# Altium PCB ALU_Logic.PcbDoc
Units mil, origin at the board's own origin, x right, y up, seen from the top; angles counter-clockwise.
Board outline 5200 x 2700 mil, 2 copper layers (Top Layer, Bottom Layer), stack 61.756 mil thick; 36 components, 79 nets, 306 pads, 155 vias.
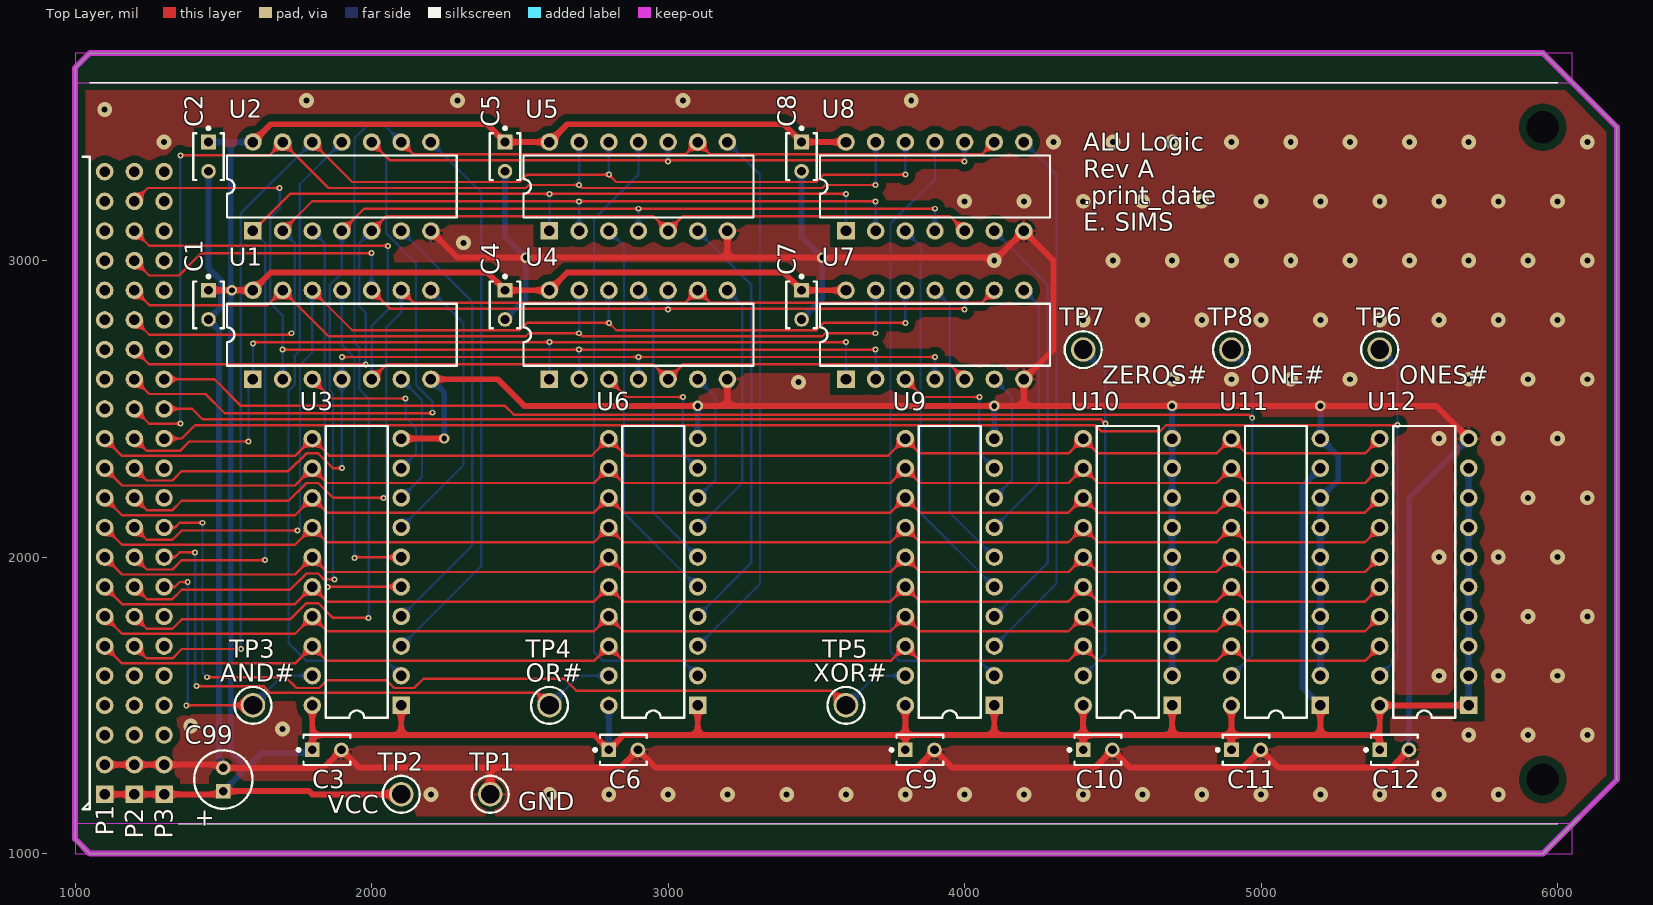
[diagram p0: Top Layer view]
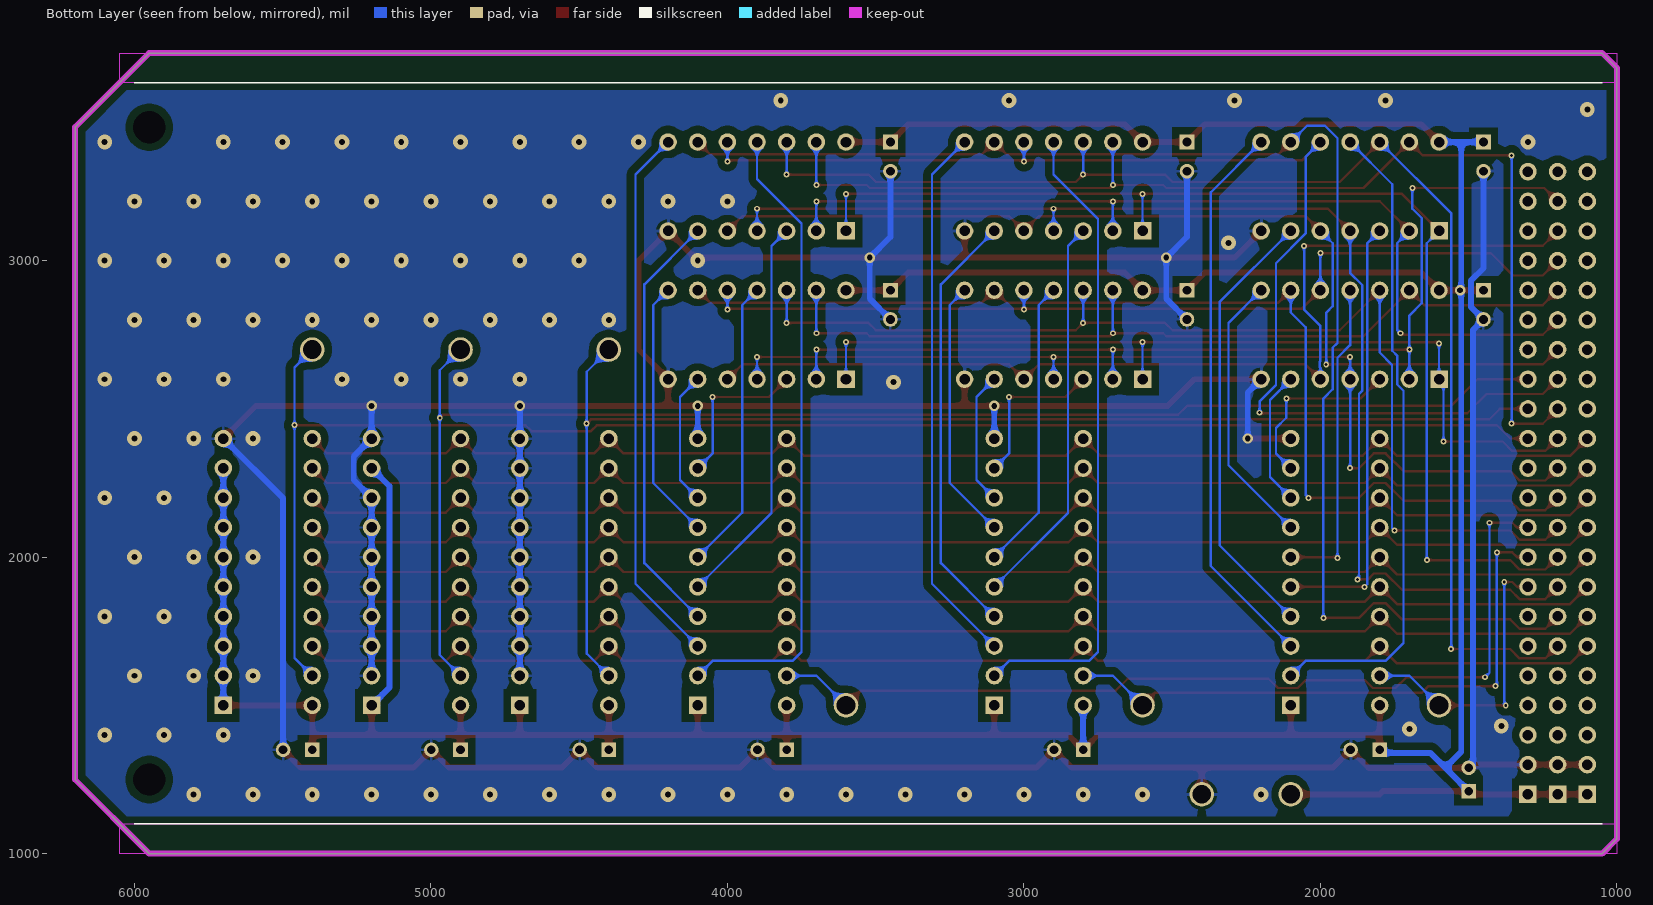
[diagram p1: Bottom Layer view, seen from below]

## Layer stack, top to bottom
Top Solder: solder mask 1, SM-001, Dk 4
Top Layer: signal copper 1.378
Dielectric 1: core 59, Core-043, Dk 4.3
Bottom Layer: signal copper 1.378
Bottom Solder: solder mask 1, SM-001, Dk 4

## Board outline
1000,1050 1050,1000 5950,1000 6200,1250 6200,3450 5950,3700 1050,3700 1000,3650

## Design rules (kind name [scope] priority, off if disabled: settings)
Clearance Clearance_Poly [InPoly] p1: gap=25 ignorepadtopadclearanceinfootprint=FALSE
Clearance [All] p2: gap=8 ignorepadtopadclearanceinfootprint=FALSE
HoleSize [All] p1: absolutevalues=TRUE maxlimit=120 minlimit=1 maxpercent=80.000 minpercent=20.000
PolygonConnect [All] p1: thpad.connectstyle=Relief thpad.reliefconductorwidth=10 thpad.reliefentries=4 thpad.polygonreliefangle="90 Angle" thpad.airgapwidth=10 smdpad.connectstyle=Relief smdpad.reliefconductorwidth=10 smdpad.reliefentries=4 smdpad.polygonreliefangle="90 Angle" smdpad.airgapwidth=10 via.connectstyle=Direct via.reliefconductorwidth=10 via.reliefentries=4 via.polygonreliefangle="90 Angle" via.airgapwidth=10
RoutingVias "Schematic Routing Via Style" [InNetClass('PWR')] p1: holewidth=20 width=35 viastyle="Through Hole" minholewidth=20 minwidth=35 maxholewidth=20 maxwidth=50
RoutingVias [All] p2: holewidth=10 width=20 viastyle="Through Hole" minholewidth=10 minwidth=20 maxholewidth=10 maxwidth=20
SilkToSilkClearance [All] p1: silktosilkclearance=5
SolderMaskExpansion [All] p1: expansion=4 istentingtop=FALSE
Width "Schematic Width Constraint" [InNetClass('PWR')] p1: maxlimit=50 minlimit=20 preferedwidth=20
Width [All] p2: maxlimit=8 minlimit=8 preferedwidth=8
28 further rules are at their usual default settings.

## Classes and differential pairs
net class REG[0..7]: REG0 REG1 REG2 REG3 REG4 REG5 REG6 REG7
net class PWR: GND VCC
net class AND[0..7]: AND0 AND1 AND2 AND3 AND4 AND5 AND6 AND7
net class XOR[0..7]: XOR0 XOR1 XOR2 XOR3 XOR4 XOR5 XOR6 XOR7
component class ZEROS: C10 U10
component class ONE: C11 U11
component class ONES: C12 U12
component class XOR: C7 C8 C9 U7 U8 U9
net class Y[0..7]: Y0 Y1 Y2 Y3 Y4 Y5 Y6 Y7
net class X[0..7]: X0 X1 X2 X3 X4 X5 X6 X7
component class OR: C4 C5 C6 U4 U5 U6
component class AND: C1 C2 C3 U1 U2 U3
component class ALU_Logic: C99 P1 P2 P3 TP1 TP2 TP3 TP4 TP5 TP6 TP7 TP8
net class BUS[0..7]: BUS0 BUS1 BUS2 BUS3 BUS4 BUS5 BUS6 BUS7

## Components (designator, comment, footprint, x,y, rotation, side; value= is the part's Value field where it differs from the comment)
C1 "K104K15X7RF5TL2" VISH-K104K15X7RF5TL2 1450,2850.79 r270 top locked
C2 "K104K15X7RF5TL2" VISH-K104K15X7RF5TL2 1450,3350.79 r270 top locked
C3 "K104K15X7RF5TL2" VISH-K104K15X7RF5TL2 1849.21,1350 r0 top locked
C4 "K104K15X7RF5TL2" VISH-K104K15X7RF5TL2 2450,2850.79 r270 top locked
C5 "K104K15X7RF5TL2" VISH-K104K15X7RF5TL2 2450,3350.79 r270 top locked
C6 "K104K15X7RF5TL2" VISH-K104K15X7RF5TL2 2849.21,1350 r0 top locked
C7 "K104K15X7RF5TL2" VISH-K104K15X7RF5TL2 3450,2850.79 r270 top locked
C8 "K104K15X7RF5TL2" VISH-K104K15X7RF5TL2 3450,3350.79 r270 top locked
C9 "K104K15X7RF5TL2" VISH-K104K15X7RF5TL2 3849.21,1350 r0 top locked
C10 "K104K15X7RF5TL2" VISH-K104K15X7RF5TL2 4449.21,1350 r0 top locked
C11 "K104K15X7RF5TL2" VISH-K104K15X7RF5TL2 4949.21,1350 r0 top locked
C12 "K104K15X7RF5TL2" VISH-K104K15X7RF5TL2 5449.21,1350 r0 top locked
C99 "Cap Pol5" C5x7 1500,1250 r90 top locked value=10uF
P1 "Header 22H" HDR1X22H 1100,1200 r90 top locked
P2 "Header 22H" HDR1X22H 1200,1200 r90 top locked
P3 "Header 22H" HDR1X22H 1300,1200 r90 top locked
TP1 "GND" KSTN-5011_V 2400,1200 r0 top locked
TP2 "VCC" KSTN-5011_V 2100,1200 r0 top locked
TP3 "AND#" KSTN-5011_V 1600,1500 r0 top locked
TP4 "OR#" KSTN-5011_V 2600,1500 r0 top locked
TP5 "XOR#" KSTN-5011_V 3600,1500 r0 top locked
TP6 "ONES#" KSTN-5011_V 5400,2700 r0 top locked
TP7 "ZEROS#" KSTN-5011_V 4400,2700 r0 top locked
TP8 "ONE#" KSTN-5011_V 4900,2700 r0 top locked
U1 "SN74LS08N" N014 1900,2750 r0 top locked
U2 "SN74LS08N" N014 1900,3250 r0 top locked
U3 "SN74LS245N" N020 1950,1950 r90 top locked
U4 "SN74LS32N" N014 2900,2750 r0 top locked
U5 "SN74LS32N" N014 2900,3250 r0 top locked
U6 "SN74LS245N" N020 2950,1950 r90 top locked
U7 "SN74LS86AN" N014 3900,2750 r0 top locked
U8 "SN74LS86AN" N014 3900,3250 r0 top locked
U9 "SN74LS245N" N020 3950,1950 r90 top locked
U10 "SN74LS245N" N020 4550,1950 r90 top locked
U11 "SN74LS245N" N020 5050,1950 r90 top locked
U12 "SN74LS245N" N020 5550,1950 r90 top locked

## Footprints (in the part's own frame and the unit in brackets; to place one, negate y for a bottom-side part, rotate by r counter-clockwise, add the part's x,y. Pads: shape width x height; smd on the part's side, far side on the other; paste and mask are expansions set on the pad)
C5x7 [mm] "Capacitor; 2 Leads"
  rect 1.25x1.25 hole 0.75: 1(-1,0)
  round 1.25 hole 0.75: 2(1,0)
  silkscreen extent -2.5,-2.5 2.5,2.5, body extent -2.5,-2.5 2.5,2.5, height 7
HDR1X22H [mm] "Connector; Header; 22 Position; Right Angle"
  rect 1.5x1.5 hole 0.9: 1(0,0)
  round 1.5 hole 0.9: 2(2.54,0) 3(5.08,0) 4(7.62,0) 5(10.16,0) 6(12.7,0) 7(15.24,0) 8(17.78,0) 9(20.32,0) 10(22.86,0) 11(25.4,0) 12(27.94,0) 13(30.48,0) 14(33.02,0) 15(35.56,0) 16(38.1,0) 17(40.64,0) 18(43.18,0) 19(45.72,0) 20(48.26,0) 21(50.8,0) 22(53.34,0)
  silkscreen extent -1.27,1.27 54.61,1.91
KSTN-5011_V [mm] "Test Point, Dia 3.17mm"
  round 2.1 hole 1.6: 1(0,0)
  silkscreen extent -1.59,-1.58 1.59,1.58, body extent -1.59,-1.59 1.59,1.59, height 8.13
N014 [mm] "DIP; 14 Leads; Row Spacing 7.62 mm; Pitch 2.54 mm"
  rect 1.5x1.5 hole 0.9: 1(-7.62,-3.81)
  round 1.5 hole 0.9: 2(-5.08,-3.81) 3(-2.54,-3.81) 4(0,-3.81) 5(2.54,-3.81) 6(5.08,-3.81) 7(7.62,-3.81) 8(7.62,3.81) 9(5.08,3.81) 10(2.54,3.81) 11(0,3.81) 12(-2.54,3.81) 13(-5.08,3.81) 14(-7.62,3.81)
  silkscreen extent -9.85,-2.65 9.85,2.65, body extent -9.15,-5.08 9.15,5.12, height 7.88
N020 [mm] "DIP; 20 Leads; Row Spacing 7.62 mm; Pitch 2.54 mm"
  rect 1.5x1.5 hole 0.9: 1(-11.43,-3.81)
  round 1.5 hole 0.9: 2(-8.89,-3.81) 3(-6.35,-3.81) 4(-3.81,-3.81) 5(-1.27,-3.81) 6(1.27,-3.81) 7(3.81,-3.81) 8(6.35,-3.81) 9(8.89,-3.81) 10(11.43,-3.81) 11(11.43,3.81) 12(8.89,3.81) 13(6.35,3.81) 14(3.81,3.81) 15(1.27,3.81) 16(-1.27,3.81) 17(-3.81,3.81) 18(-6.35,3.81) 19(-8.89,3.81) 20(-11.43,3.81)
  silkscreen extent -12.5,-2.65 12.5,2.65, body extent -13.08,-5.08 13.08,5.12, height 7.88
VISH-K104K15X7RF5TL2 [mm] "THD, 2-Leads, Body 4x2.6mm"
  rect 1.25x1.25 hole 0.75: 1(-1.25,0)
  round 1.25 hole 0.75: 2(1.25,0)
  silkscreen extent -2.55,-1.3 2,1.3, body extent -2,-1.3 2,1.3, height 5.6

## Part data
C1 C2 C3 C4 C5 C6 C7 C8 C9 C10 C11 C12: library part CMP-2000-06508-1, "Ceramic Capacitor, 100 nF, +/- 10%, 50 V, -55 to 125 degC, 2-Pin THD, RoHS, Tape and Reel", Capacitance=0.1µF, Manufacturer=Vishay, Operating Temperature=-55°C~125°C, Package / Case=Radial, Package Description="2-Pin Through Hole Device, Body 4 x 2.6 mm", Ratings=-, Standard Package=1, Temperature Coefficient=X7R, Tolerance=±10%, Voltage - Rated=50V, Applications=GeneralPurpose, Catalog Drawings=Mono-KapSide2-15_5.58Mono-KapSide1_15, Category=Capacitors, Datasheet URL=http://www.vishay.com/docs/45171/kseries.pdf, Datasheet Version=08/2013, Family=CeramicCapacitors, Features=-, Height - Seated (Max)="0.220\"(5.58mm)", Lead Spacing="0.098\"(2.50mm)", Lead Style=Straight, Manufacturer URL=http://www.vishay.com/, Mounting Technology=ThroughHole, Mounting Type=ThroughHole, Online Catalog=Mono-Kap™Series, Other Names=BC1084CT, Package Reference=K104K15X7RF5TL2, Packaging=CutTape(CT), Series=Mono-Kap™K, Size / Dimension="0.157\"Lx0.098\"W(4.00mmx2.50mm)", Thickness (Max)=-
C99: "Polarized Capacitor", LatestRevisionDate=17-Jul-2002, LatestRevisionNote="Re-released for DXP Platform.", PackageDescription="Polarized Capacitor; 2 Leads", PackageReference=POLAR0.8, Published=8-Jun-2000, Publisher="Altium Limited"
P1 P2 P3: "Header, 22-Pin, Right Angle", LatestRevisionDate=17-Jul-2002, LatestRevisionNote="Re-released for DXP Platform.", Publisher="Altium Limited", System=Connector
TP1 TP2 TP3 TP4 TP5 TP6 TP7 TP8: library part TP
U1 U2: "Quadruple 2-Input Positive-AND Gate", ComponentLink1Description="Manufacturer Link", ComponentLink1URL=http://www.ti.com/, ComponentLink2Description=Datasheet, ComponentLink2URL=http://www-s.ti.com/sc/ds/SN74LS08.pdf, DatasheetVersion=Mar-1988, LatestRevisionDate=04-Mar-2005, LatestRevisionNote="Stylized 3D Model Added.", PackageDescription="DIP; 14 Leads; Row Spacing 7.62 mm; Pitch 2.54 mm", PackageReference=N014, PackageVersion=Oct-1995, Published=8-Jun-2000, Publisher="Altium Limited"
U3 U6 U9 U10 U11 U12: "Octal Bus Transceiver with 3-State Outputs", ComponentLink1Description="Manufacturer Link", ComponentLink1URL=http://www.ti.com/, ComponentLink2Description=Datasheet, ComponentLink2URL=http://www-s.ti.com/sc/ds/sn74ls245.pdf, DatasheetVersion=Mar-1988, LatestRevisionDate=04-Mar-2005, LatestRevisionNote="Stylized 3D Model Added.", PackageDescription="DIP; 20 Leads; Row Spacing 7.62 mm; Pitch 2.54 mm", PackageReference=N020, PackageVersion=Oct-1995, Published=8-Jun-2000, Publisher="Altium Limited"
U4 U5: "Quadruple 2-Input Positive-OR Gate", ComponentLink1Description="Manufacturer Link", ComponentLink1URL=http://www.ti.com/, ComponentLink2Description=Datasheet, ComponentLink2URL=http://www-s.ti.com/sc/ds/sn74ls32.pdf, DatasheetVersion=Mar-1988, LatestRevisionDate=04-Mar-2005, LatestRevisionNote="Stylized 3D Model Added.", PackageDescription="DIP; 14 Leads; Row Spacing 7.62 mm; Pitch 2.54 mm", PackageReference=N014, PackageVersion=Oct-1995, Published=8-Jun-2000, Publisher="Altium Limited"
U7 U8: "Quadruple 2-Input Exclusive-OR Gate", ComponentLink1Description="Manufacturer Link", ComponentLink1URL=http://www.ti.com/, ComponentLink2Description=Datasheet, ComponentLink2URL=http://www-s.ti.com/sc/ds/sn74ls86a.pdf, DatasheetVersion=Mar-1988, LatestRevisionDate=04-Mar-2005, LatestRevisionNote="Stylized 3D Model Added.", PackageDescription="DIP; 14 Leads; Row Spacing 7.62 mm; Pitch 2.54 mm", PackageReference=N014, PackageVersion=Oct-1995, Published=8-Jun-2000, Publisher="Altium Limited"

## Free pads (board coordinates)
  round 0 hole 109: ""(5950,1250) ""(5950,3450)

## Via types
v1: diameter 50, hole 20, Top Layer to Bottom Layer, tented both sides, 90 vias
v2: diameter 20, hole 10, Top Layer to Bottom Layer, tented both sides, 57 vias
v3: diameter 35, hole 20, Top Layer to Bottom Layer, tented both sides, 8 vias

## Nets (pads, with @x,y where several pads share a name; then routed paths per layer and width w, separated by ;. In a path a pad name is that pad's centre, name@x,y a point inside that pad or via, vN(x,y) a via of type N, cw(c..) or ccw(c..) an arc to the next point about the centre after c; other vN are vias at no path point)
ALU_RFU16: P1.16
ALU_RFU17: P1.17
ALU_RFU18: P1.18
ALU_RFU19: P1.19
ALU_RFU20: P1.20
ALU_RFU21: P1.21
ALU_RFU22: P1.22
ALU_RFU44: P2.22
ALU_RFU65: P3.21
ALU_RFU66: P3.22
AND0: U1.3 U3.9 | length 612.1
  Top Layer w8: U1.3 1865,2535 v2(2115,2535)
  Bottom Layer w8: U3.9 2150,2350 2150,2435 2115,2470 v2(2115,2535)
AND1: U1.6 U3.8 | length 458
  Bottom Layer w8: U3.8 2170,2270 2170,2530 U1.6
AND2: U1.8 U3.7 | length 932.5
  Bottom Layer w8: U3.7 2310,2310 2310,2790 U1.8
AND3: U1.11 U3.6 | length 1078.7
  Top Layer w8: v2(1942.47,1997.47) 1945,2000 U3.6
  Bottom Layer w8: U1.11 1900,2715 1942.47,2672.53 1942.47,2616.26 v2(1942.47,1997.47)
AND4: U2.3 U3.5 | length 1470
  Top Layer w8: v2(1851.22,1900) U3.5
  Bottom Layer w8: U2.3 1842.47,3057.53 1842.47,2923.83 1842.47,2876.17 1842.47,1908.75 v2(1851.22,1900)
AND5: U2.6 U3.4 | length 1498.8
  Bottom Layer w8: U3.4 2340,2040 2340,2860 U2.6
AND6: U2.8 U3.3 | length 1882.3
  Bottom Layer w8: U3.3 2370,1970 2370,3230 U2.8
AND7: U2.11 U3.2 | length 2190.1
  Bottom Layer w8: U2.11 1757.53,3257.53 1757.53,2696 1741.53,2680 1741.53,2582.8 1720,2561.27 1720,1710 1780,1650 2050,1650 U3.2
AND_OUT#: P3.8 TP3.1 U3.19 | length 971.1
  Top Layer w8: P3.8 1337,1900 1353,1916 v2(1380,1916) ; v2(1375,1500) TP3.1
  Bottom Layer w8: v2(1375,1500) 1380,1505 v2(1380,1916) ; TP3.1 1700,1600 U3.19
BUS0: P1.13 U3.11 U6.11 U9.11 U10.11 U11.11 U12.11 | length 4568
  Top Layer w8: P1.13 1158.47,2341.53 1741.53,2341.53 U3.11 1857.53,2342.47 2076.17,2342.47 2123.83,2342.47 2742.47,2342.47 U6.11 2857.53,2342.47 3076.17,2342.47 3123.83,2342.47 3742.47,2342.47 U9.11 3850,2350 4350,2350 U10.11 4450,2350 4850,2350 U11.11 4950,2350 5350,2350 U12.11
BUS1: P1.12 U3.12 U6.12 U9.12 U10.12 U11.12 U12.12 | length 4555.5
  Top Layer w8: P1.12 1158.47,2241.53 1741.53,2241.53 U3.12 1850,2250 2750,2250 U6.12 2850,2250 3750,2250 U9.12 3850,2250 4350,2250 U10.12 4450,2250 4850,2250 U11.12 4950,2250 5350,2250 U12.12
BUS2: P1.11 U3.13 U6.13 U9.13 U10.13 U11.13 U12.13 | length 4555.5
  Top Layer w8: P1.11 1158.47,2141.53 1741.53,2141.53 U3.13 1850,2150 2750,2150 U6.13 2850,2150 3750,2150 U9.13 3850,2150 4350,2150 U10.13 4450,2150 4850,2150 U11.13 4950,2150 5350,2150 U12.13
BUS3: P1.10 U3.14 U6.14 U9.14 U10.14 U11.14 U12.14 | length 4555.5
  Top Layer w8: P1.10 1158.47,2041.53 1741.53,2041.53 U3.14 1850,2050 2750,2050 U6.14 2850,2050 3750,2050 U9.14 3850,2050 4350,2050 U10.14 4450,2050 4850,2050 U11.14 4950,2050 5350,2050 U12.14
BUS4: P1.9 U3.15 U6.15 U9.15 U10.15 U11.15 U12.15 | length 4555.5
  Top Layer w8: P1.9 1158.47,1941.53 1741.53,1941.53 U3.15 1850,1950 2750,1950 U6.15 2850,1950 3750,1950 U9.15 3850,1950 4350,1950 U10.15 4450,1950 4850,1950 U11.15 4950,1950 5350,1950 U12.15
BUS5: P1.8 U3.16 U6.16 U9.16 U10.16 U11.16 U12.16 | length 4555.5
  Top Layer w8: P1.8 1158.47,1841.53 1741.53,1841.53 U3.16 1850,1850 2750,1850 U6.16 2850,1850 3750,1850 U9.16 3850,1850 4350,1850 U10.16 4450,1850 4850,1850 U11.16 4950,1850 5350,1850 U12.16
BUS6: P1.7 U3.17 U6.17 U9.17 U10.17 U11.17 U12.17 | length 4555.5
  Top Layer w8: P1.7 1158.47,1741.53 1741.53,1741.53 U3.17 1850,1750 2750,1750 U6.17 2850,1750 3750,1750 U9.17 3850,1750 4350,1750 U10.17 4450,1750 4850,1750 U11.17 4950,1750 5350,1750 U12.17
BUS7: P1.6 U3.18 U6.18 U9.18 U10.18 U11.18 U12.18 | length 4555.5
  Top Layer w8: P1.6 1158.47,1641.53 1741.53,1641.53 U3.18 1850,1650 2750,1650 U6.18 2850,1650 3750,1650 U9.18 3850,1650 4350,1650 U10.18 4450,1650 4850,1650 U11.18 4950,1650 5350,1650 U12.18
CLK: P1.3
CO_IMM: P1.14
F4_IMM: P1.15
GND: C1.2 C2.2 C3.2 C4.2 C5.2 C6.2 C7.2 C8.2 C9.2 C10.2 C11.2 C12.2 C99.2 P1.2 P2.2 P3.2 TP1.1 U1.7 U2.7 U3.10 U4.7 U5.7 U6.10 U7.7 U8.7 U9.10 U10.2 U10.3 U10.4 U10.5 U10.6 U10.7 U10.8 U10.9 U10.10 U11.2 U11.3 U11.4 U11.5 U11.6 U11.7 U11.8 U11.10 U12.10 | length 18057.7
  Top Layer w20: P1.2 P2.2 P3.2 1489.37,1300 C99.2 1837.8,1289.37 C3.2 1958.43,1290 2200,1290 2838.43,1290 C6.2 2958.43,1290 3838.43,1290 C9.2 3958.43,1290 4438.43,1290 C10.2 4558.43,1290 4938.43,1290 C11.2 5058.43,1290 5438.43,1290 C12.2 ; U3.10 v3(2245,2400) ; U1.7 2425,2600 2515,2510 3200,2510 ; U2.7 2290,3010 v3(2520,3010) 3200,3010 ; TP1.1 2400,1290 ; U4.7 3200,2510 ; U5.7 3200,3010 ; v3@5200,2500 v3(5200,2510) ; U12.10 5590,2510 v3(5200,2510) ; 3200,2510 4200,2510 ; 3200,3010 v3(3520,3010) 4110,3010 U8.7 4300,3000 4300,2700 U7.7 4200,2510 ; 4200,2510 v3(4700,2510) v3(5200,2510)
  Bottom Layer w20: C2.2 1450,2974.67 1492.61,2932.06 1492.61,2844.18 C1.2 1485,2766.57 1485,1304.37 C99.2 ; U1.7 2245,2555 v3(2245,2400) ; C4.2 2520,2871.57 v3(2520,3010) 2450,3080 C5.2 ; U6.10 v3(3100,2510) ; C7.2 3520,2871.57 v3(3520,3010) 3450,3080 C8.2 ; U9.10 v3(4100,2510) ; U10.2 U10.3 U10.4 U10.5 U10.6 U10.7 U10.8 U10.9 U10.10 v3(4700,2510) ; U11.2 U11.3 U11.4 U11.5 U11.6 U11.7 U11.8 5260,2260 5260,2340 U11.10 v3(5200,2510) ; C12.2 5498.43,2198.43 U12.10
  other v1: 2200,1200 2600,1200 2800,1200 3000,1200 3200,1200 3400,1200 3600,1200 3800,1200 4000,1200 4200,1200 4400,1200 4600,1200 4800,1200 5000,1200 5200,1200 5400,1200 5600,1200 5800,1200 5700,1400 5900,1400 6100,1400 1700,1420 1390,1430 5600,1600 5800,1600 6000,1600 5900,1800 6100,1800 5600,2000 5800,2000 6000,2000 5900,2200 6100,2200 5600,2400 5800,2400 6000,2400 3440,2590 4700,2600 4900,2600 5100,2600 5300,2600 5700,2600 5900,2600 6100,2600 4400,2800 4600,2800 4800,2800 5000,2800 5200,2800 5400,2800 5600,2800 5800,2800 6000,2800 4100,3000 4500,3000 4700,3000 4900,3000 5100,3000 5300,3000 5500,3000 5700,3000 5900,3000 6100,3000 2310,3060 4000,3200 4200,3200 4400,3200 4600,3200 4800,3200 5000,3200 5200,3200 5400,3200 5600,3200 5800,3200 6000,3200 1300,3400 4300,3400 4500,3400 4700,3400 4900,3400 5100,3400 5300,3400 5500,3400 5700,3400 6100,3400 1100,3510 1780,3540 2290,3540 3050,3540 3820,3540
M\1: P3.6
M\2: P3.7
M\4: P3.9 TP4.1 U6.19 | length 2023
  Top Layer w8: P3.9 1337,2000 1353,2016 v2(1405,2016) ; v2(1410,1565) 1635,1565 1657.53,1542.47 2557.53,1542.47 TP4.1
  Bottom Layer w8: v2(1405,2016) 1405,1570 v2(1410,1565) ; TP4.1 2700,1600 U6.19
M\5: P3.10 TP5.1 U9.19 | length 3147.7
  Top Layer w8: P3.10 1337,2100 1353,2116 v2(1430,2116) ; v2(1445,1595) 1710,1595 1746.53,1558.47 1823.47,1558.47 1850,1585 2050,1585 2076.53,1558.47 2143.47,1558.47 2175,1590 2650,1590 2690,1550 3550,1550 TP5.1
  Bottom Layer w8: v2(1430,2116) 1430,1610 v2(1445,1595) ; TP5.1 3700,1600 U9.19
M\6: P3.11
M\7: P3.12
M\8: P3.13 TP6.1 U12.19 | length 5344.9
  Top Layer w8: P3.13 1360,2400 1405,2445 4440,2445 4460,2425 4660,2425 4680,2445 v2(5460,2445)
  Bottom Layer w8: U12.19 5460,1660 v2(5460,2445) 5460,2640 TP6.1
M\9: P3.14 TP7.1 U10.19 | length 4357.5
  Top Layer w8: P3.14 1395,2500 1430.5,2464.5 4460.5,2464.5 v2(4475,2450)
  Bottom Layer w8: U10.19 4474.58,1674.58 4474.58,2625.42 TP7.1
M\10: P3.15 TP8.1 U11.19 | length 4881.8
  Top Layer w8: P3.15 1470,2600 1560,2510 2450,2510 2479.5,2480.5 4959.5,2480.5 v2(4970,2470)
  Bottom Layer w8: U11.19 4970,1670 v2(4970,2470) 4970,2630 TP8.1
M\11: P3.16
M\12: P3.17
M\13: P3.18
M\14: P3.19
M\15: P3.20
REG0: U4.3 U6.9 | length 535.6
  Top Layer w8: U4.3 2860,2540 v2(3050,2540)
  Bottom Layer w8: v2(3050,2540) 3050,2350 U6.9
REG1: U4.6 U6.8 | length 449.7
  Bottom Layer w8: U6.8 3160,2260 3160,2540 U4.6
REG2: U4.8 U6.7 | length 882.8
  Bottom Layer w8: U6.7 3250,2250 3250,2850 U4.8
REG3: U4.11 U6.6 | length 982.8
  Bottom Layer w8: U4.11 2950,2850 2950,2150 U6.6
REG4: U5.3 U6.5 | length 1324.3
  Bottom Layer w8: U5.3 2851.22,3048.78 2851.22,2148.78 U6.5
REG5: U5.6 U6.4 | length 1449.1
  Bottom Layer w8: U6.4 3280,1980 3280,2920 U5.6
REG6: U5.8 U6.3 | length 1832.5
  Bottom Layer w8: U6.3 3310,1910 3310,3290 U5.8
REG7: U5.11 U6.2 | length 2165.3
  Bottom Layer w8: U5.11 2900,3290 2750,3140 2750,1680 2780,1650 2808.73,1650 3050,1650 U6.2
RST#: P1.4
VCC: C1.1 C2.1 C3.1 C4.1 C5.1 C6.1 C7.1 C8.1 C9.1 C10.1 C11.1 C12.1 C99.1 P1.1 P2.1 P3.1 TP2.1 U1.14 U2.14 U3.1 U3.20 U4.14 U5.14 U6.1 U6.20 U7.14 U8.14 U9.1 U9.20 U10.1 U10.20 U11.1 U11.9 U11.20 U12.1 U12.2 U12.3 U12.4 U12.5 U12.6 U12.7 U12.8 U12.9 U12.20 | length 14969.2
  Top Layer w20: P1.1 P2.1 P3.1 1489.37,1200 C99.1 1789.37,1210.63 1800,1200 TP2.1 ; C1.1 U1.14 1660,2960 2390,2960 C4.1 U4.14 2660,2960 3390,2960 C7.1 U7.14 ; U2.14 1660,3460 2390,3460 C5.1 U5.14 2660,3460 3390,3460 C8.1 U8.14 ; C3.1 1800,1400 ; U3.20 1800,1400 ; U3.1 2100,1400 ; U6.1 3100,1400 ; 3800,1375 3800,1400 ; U9.20 3800,1400 ; U9.1 4100,1400 ; C10.1 4400,1400 ; U10.20 4400,1400 ; U10.1 4700,1400 ; C11.1 4900,1400 ; U11.20 4900,1400 ; U11.1 5200,1400 ; C12.1 5400,1400 ; U12.1 U12.20 5400,1400 ; 1800,1400 2100,1400 ; 2100,1400 2750,1400 C6.1 2850,1400 3100,1400 ; 3100,1400 3800,1400 ; 3800,1400 4100,1400 ; 4100,1400 4400,1400 ; 4400,1400 4700,1400 ; 4700,1400 4900,1400 ; 4900,1400 5200,1400 ; 5200,1400 5400,1400
  Bottom Layer w20: C2.1 1525,3400 ; C99.1 1578.74,1289.37 ; v3(1528.97,2900) v3@1529.49,2900.51 ; U2.14 1525,3400 ; C3.1 1790,1340 1629.37,1340 1578.74,1289.37 ; C6.1 U6.20 ; U11.1 5140,1560 5140,2240 U11.9 ; U12.1 U12.2 U12.3 U12.4 U12.5 U12.6 U12.7 U12.8 U12.9 ; 1525,3400 1525,2905 1530,2900 1525,2895 1525,1343.11 1578.74,1289.37
X0: P2.13 U1.1 U4.1 U7.1 | length 3003.5
  Top Layer w8: P2.13 1241.53,2358.47 1353.47,2358.47 1385,2390 v2(1585,2390) ; v2(1600,2720) 1605,2725 v2(2600,2725) v2(3600,2725)
  Bottom Layer w8: v2(1585,2390) 1585,2585 U1.1 v2(1600,2720) ; U4.1 v2(2600,2725) ; U7.1 v2(3600,2725)
X1: P2.12 U1.4 U4.4 U7.4 | length 3300.8
  Top Layer w8: P2.12 1241.53,2258.47 1328.47,2258.47 1360,2290 1720,2290 1780,2350 1820,2350 1870,2300 v2(1900,2300) ; v2(1900,2675) v2(2900,2675) v2(3900,2675)
  Bottom Layer w8: v2(1900,2300) U1.4 v2(1900,2675) ; U4.4 v2(2900,2675) ; U7.4 v2(3900,2675)
X2: P2.11 U1.9 U4.9 U7.9 | length 3709.5
  Top Layer w8: P2.11 1241.53,2158.47 1328.47,2158.47 1360,2190 1720,2190 1780,2250 1820,2250 1870,2200 v2(2040,2200) ; U1.9 2141.53,2858.47 3058.47,2858.47 U4.9 3141.53,2858.47 4058.47,2858.47 U7.9
  Bottom Layer w8: v2(2040,2200) 2050,2210 2050,2775 2100,2825 U1.9
X3: P2.10 U1.12 U4.12 U7.12 | length 3718
  Top Layer w8: P2.10 1241.53,2058.47 1328.47,2058.47 1360,2090 v2(1750,2090) ; U1.12 1935.03,2764.97 2499.08,2764.97 2524.11,2790 v2(2800,2790) 2825.03,2764.97 3499.08,2764.97 3524.11,2790 v2(3800,2790)
  Bottom Layer w8: v2(1750,2090) 1758.47,2098.47 1758.47,2648.47 1800,2690 U1.12 ; v2(2800,2790) U4.12 ; v2(3800,2790) U7.12
X4: P2.9 U2.1 U5.1 U8.1 | length 3899.9
  Top Layer w8: P2.9 1241.53,1958.47 1328.47,1958.47 1360,1990 v2(1640,1990) ; U2.1 1725,3225 v2(2600,3225) v2(3600,3225)
  Bottom Layer w8: U2.1 1641.53,3058.47 1641.53,1991.53 v2(1640,1990) ; U5.1 v2(2600,3225) ; U8.1 v2(3600,3225)
X5: P2.8 U2.4 U5.4 U8.4 | length 4116.4
  Top Layer w8: P2.8 1241.53,1858.47 1328.47,1858.47 1360,1890 1725,1890 1780,1945 1820,1945 1840,1925 v2(1875,1925) ; U2.4 1975,3175 v2(2900,3175) v2(3900,3175)
  Bottom Layer w8: v2(1875,1925) 1870,1930 1870,2200 1870,2550 1858.47,2561.53 1858.47,2917.2 1900,2958.73 U2.4 ; U5.4 v2(2900,3175) ; U8.4 v2(3900,3175)
X6: P2.7 U2.9 U5.9 U8.9 | length 4767.6
  Top Layer w8: P2.7 1241.53,1758.47 1328.47,1758.47 1360,1790 1725,1790 1780,1845 1820,1845 1870,1795 v2(1990,1795) ; U2.9 2141.53,3358.47 3058.47,3358.47 U5.9 3141.53,3358.47 4058.47,3358.47 U8.9
  Bottom Layer w8: v2(1990,1795) 1990,2535 1958.47,2566.53 1958.47,2706.53 1942.47,2722.53 1942.47,3412.47 1985,3455 2045,3455 U2.9
X7: P2.6 U2.12 U5.12 U8.12 | length 4508
  Top Layer w8: P2.6 1241.53,1658.47 1328.47,1658.47 1360,1690 v2(1560,1690) ; U2.12 1935.03,3264.97 2499.08,3264.97 2524.11,3290 v2(2800,3290) 2825.03,3264.97 3499.08,3264.97 3524.11,3290 v2(3800,3290)
  Bottom Layer w8: v2(1560,1690) 1558.47,1691.53 1558.47,3158.47 U2.12 ; v2(2800,3290) U5.12 ; v2(3800,3290) U8.12
XOR0: U7.3 U9.9 | length 535.6
  Top Layer w8: U7.3 3860,2540 v2(4050,2540)
  Bottom Layer w8: v2(4050,2540) 4050,2350 U9.9
XOR1: U7.6 U9.8 | length 449.7
  Bottom Layer w8: U9.8 4160,2260 4160,2540 U7.6
XOR2: U7.8 U9.7 | length 882.8
  Bottom Layer w8: U9.7 4250,2250 4250,2850 U7.8
XOR3: U7.11 U9.6 | length 982.8
  Bottom Layer w8: U7.11 3950,2850 3950,2150 U9.6
XOR4: U8.3 U9.5 | length 1324.3
  Bottom Layer w8: U8.3 3851.22,3048.78 3851.22,2148.78 U9.5
XOR5: U8.6 U9.4 | length 1449.1
  Bottom Layer w8: U9.4 4280,1980 4280,2920 U8.6
XOR6: U8.8 U9.3 | length 1832.5
  Bottom Layer w8: U9.3 4310,1910 4310,3290 U8.8
XOR7: U8.11 U9.2 | length 2165.3
  Bottom Layer w8: U8.11 3900,3275 3750,3125 3750,1680 3780,1650 3808.73,1650 4050,1650 U9.2
Y0: P2.21 U1.2 U4.2 U7.2 | length 3383.9
  Top Layer w8: P2.21 1245,3245 v2(1690,3245) ; v2(1700,2700) v2(2700,2700) v2(3700,2700)
  Bottom Layer w8: v2(1690,3245) 1690,3175 1658.47,3143.47 1658.47,2856.53 1700,2815 v2(1700,2700) U1.2 ; U4.2 v2(2700,2700) ; U7.2 v2(3700,2700)
Y1: P2.20 U1.5 U4.5 U7.5 | length 3438.4
  Top Layer w8: P2.20 1250,3050 v2(2055,3050) v2@2060,3050 ; U1.5 2050,2650 2950,2650 U4.5 3050,2650 3950,2650 U7.5
  Bottom Layer w8: U1.5 2000,2638.41 2002.47,2640.89 2002.47,2659.11 2000,2661.59 2000,2780 2055,2835 v2(2055,3050)
Y2: P2.19 U1.10 U4.10 U7.10 | length 3136.3
  Top Layer w8: P2.19 1250,2950 1350,2950 1425,3025 v2(2000,3025) ; U1.10 2061.82,2838.18 2996.82,2838.18 v2(3000,2835) 3003.18,2838.18 3996.82,2838.18 v2(4000,2835)
  Bottom Layer w8: U1.10 v2(2000,3025) ; v2(3000,2835) U4.10 ; v2(4000,2835) U7.10
Y3: P2.18 U1.13 U4.13 U7.13 | length 2908.1
  Top Layer w8: P2.18 1250,2850 1650,2850 U1.13 1855,2745 2520,2745 2530,2755 v2(2700,2755) 2710,2745 3520,2745 3530,2755 v2(3700,2755)
  Bottom Layer w8: v2(2700,2755) U4.13 ; v2(3700,2755) U7.13
Y4: P2.17 U2.2 U5.2 U8.2 | length 3161.2
  Top Layer w8: P2.17 1250,2750 1725,2750 v2(1730,2755) ; U2.2 1800,3200 v2(2700,3200) v2(3700,3200)
  Bottom Layer w8: U2.2 1741.53,3058.47 1741.53,2917.2 1741.53,2882.8 1741.53,2766.53 v2(1730,2755) ; U5.2 v2(2700,3200) ; U8.2 v2(3700,3200)
Y5: P2.16 U2.5 U5.5 U8.5 | length 3360.6
  Top Layer w8: P2.16 1250,2650 1980,2650 v2(1980.47,2650) ; U2.5 2050,3150 2950,3150 U5.5 3050,3150 3950,3150 U8.5
  Bottom Layer w8: v2(1980.47,2650) 1980,2650 1980,2825 1958.47,2846.53 1958.47,2882.8 1958.47,2917.2 1958.47,3058.47 U2.5
Y6: P2.15 U2.10 U5.10 U8.10 | length 4212.1
  Top Layer w8: P2.15 1250,2550 1440,2550 1505,2485 2205,2485 v2(2205,2487) ; U2.10 2061.82,3338.18 2996.82,3338.18 v2(3000,3335) 3003.18,3338.18 3996.82,3338.18 v2(4000,3335)
  Bottom Layer w8: U2.10 2050,3350 2050,3091.27 2150,2991.27 2150,2580 2205,2525 v2(2205,2487) ; v2(3000,3335) U5.10 ; v2(4000,3335) U8.10
Y7: P2.14 U2.13 U5.13 U8.13 | length 3811
  Top Layer w8: P2.14 1250,2450 v2(1355,2450) ; v2(1355,3355) 1655,3355 U2.13 1855,3245 2520,3245 2530,3255 v2(2700,3255) 2710,3245 3520,3245 3530,3255 v2(3700,3255)
  Bottom Layer w8: v2(1355,2450) v2(1355,3355) ; v2(2700,3255) U5.13 ; v2(3700,3255) U8.13
pads on no net: P1.5 P2.3 P2.4 P2.5 P3.3 P3.4 P3.5

## Polygon pours and split planes (outlines as drawn)
GND on Bottom Layer "GND_L02_P001" (solid, remove dead copper, pour order 1): 1000,1000 1000,3700 6200,3700 6200,1000
GND on Top Layer "GND_L01_P000" (solid, remove dead copper, pour order 0): 1000,1000 1000,3700 6200,3700 6200,1000

## Keep-outs
Top Layer:
  rectangle: 1000,3600 6050,3700
  rectangle: 1000,1000 6050,1100
Bottom Layer:
  rectangle: 1000,1000 6050,1100
  rectangle: 1000,3600 6050,3700
Keep-Out Layer:
  the board outline again, w20

## Silkscreen, mask and mechanical layers (free items; w line width, h text height)
Top Overlay:
  lines w5: 1050,3600 6000,3600 ; 1350,1100 6000,1100
  text "ALU Logic / Rev A / .print_date / E. SIMS" at 4400,3100 h60
Bottom Overlay:
  lines w5: 1050,1100 6000,1100 ; 1050,3600 6000,3600

## Text inside footprints (layer, text, board x,y; h text height)
C99: Top Overlay "+" at 1412.38,1152.96 h59.06 r270